# Altium PCB UF_Servo.PcbDoc (part 10 of 12)
Units mm, origin at the board's own origin, x right, y up, seen from the top; angles counter-clockwise.
Board outline 222.63 x 100.1 mm, 6 copper layers (L1, L2, L3, L4, L5, L6), stack 1.609 mm thick; 1138 components, 775 nets, 3720 pads, 1641 vias.
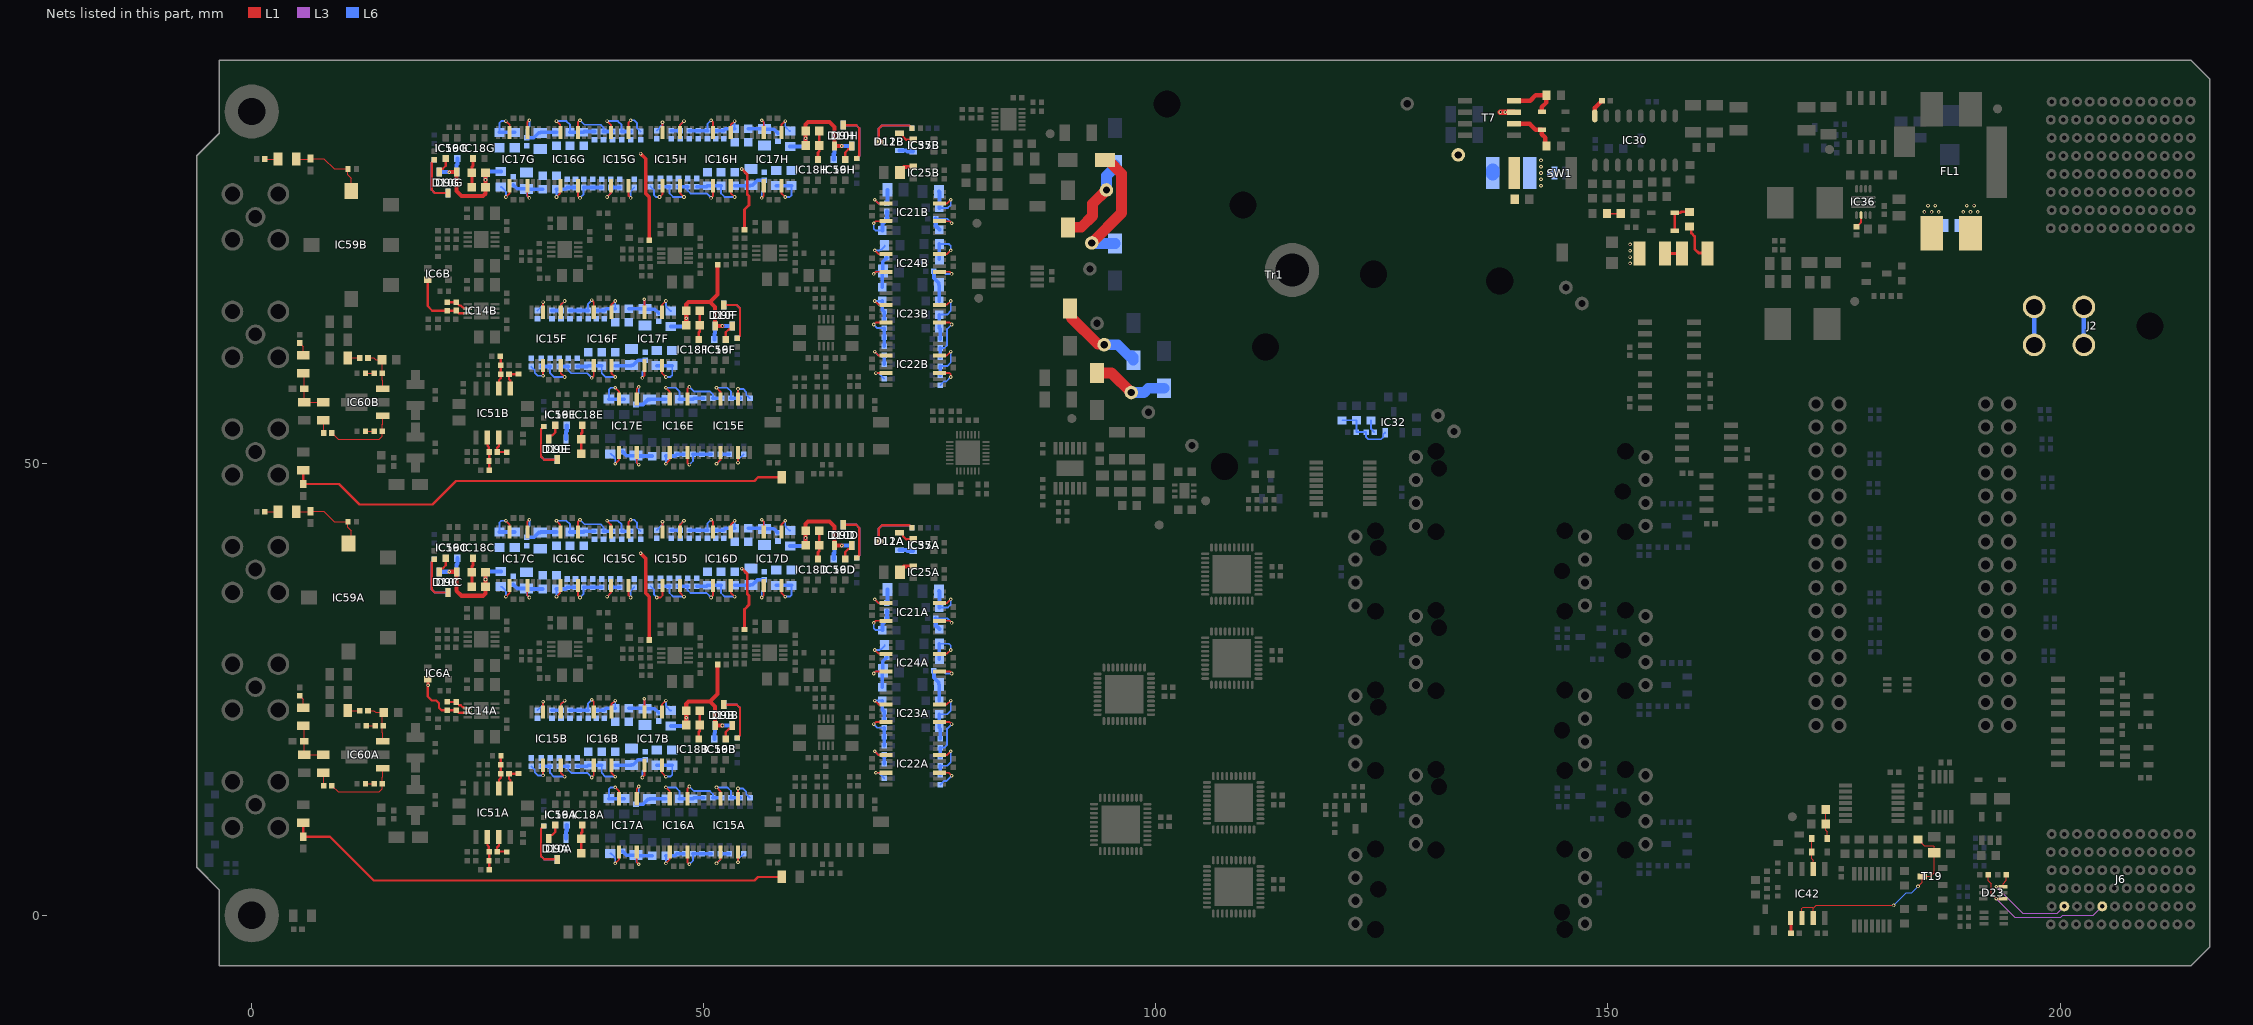
[diagram p11: the nets of this part, all layers, seen from the top]

## Via types
v1: diameter 0.4, hole 0.2, L1 to L6, tented both sides, 1545 vias
v2: diameter 0.4, hole 0.2, L1 to L6, 84 vias
v3: diameter 0.5, hole 0.25, L1 to L6, tented both sides, 12 vias

## Nets (pads, with @x,y where several pads share a name; then routed paths per layer and width w, separated by ;. In a path a pad name is that pad's centre, name@x,y a point inside that pad or via, vN(x,y) a via of type N, cw(c..) or ccw(c..) an arc to the next point about the centre after c; other vN are vias at no path point) (continued)
NetC23A_1: C23A.1 IC6A.4 IC14A.3 R53A.1 | length 8
  L1 w0.25: IC6A.4@19.45,26.165 19.45,24.25 19.9,23.8 20.4,23.8 20.7,23.5 20.7,23 20.97,22.73 R53A.1@21.6,22.73 22.58,22.73 C23A.1@22.6,22.75 22.9,22.45 IC14A.3@23.9,22.45
  L1 w0.3: v1(19.5,25.5) IC6A.4@19.5,26.03
NetC23A_2: C23A.2 IC14A.2 R53A.2 | length 2.6
  L1 w0.25: R53A.2@21.6,23.67 21.62,23.65 C23A.2@22.6,23.65 22.95,23.3 23.104,23.3 23.331,23.073 23.452,23.073 23.575,22.95 IC14A.2@23.9,22.95
NetC23B_1: C23B.1 IC6B.4 IC14B.3 R53B.1 | length 7.7
  L1 w0.25: IC6B.4@19.45,70.365 19.45,67.45 19.97,66.93 R53B.1@21.6,66.93 22.58,66.93 C23B.1@22.6,66.95 22.9,66.65 IC14B.3@23.9,66.65
NetC23B_2: C23B.2 IC14B.2 R53B.2 | length 2.6
  L1 w0.25: R53B.2@21.6,67.87 21.62,67.85 C23B.2@22.6,67.85 22.95,67.5 23.104,67.5 23.331,67.273 23.452,67.273 23.575,67.15 IC14B.2@23.9,67.15
NetC39A_1: C39A.1 IC15A.3 | length 3
  L1 w0.2: IC15A.3@53.775,12.95 v1(53.775,14.075)
  L6 w0.2: v1(53.775,14.075) 54.35,14.075 54.7,13.725 54.7,13.45 C39A.1@55.1,13.05
NetC39B_1: C39B.1 IC15B.3 | length 3
  L1 w0.2: v1(32.225,15.525) IC15B.3@32.225,16.65
  L6 w0.2: C39B.1@30.9,16.55 31.3,16.15 31.3,15.875 31.65,15.525 v1(32.225,15.525)
NetC39B_2: C39B.2 C40B.1 C41B.1 C42B.1 C43B.1 C44B.2 C47B.1 C48B.2 C49B.1 C50B.1 C51B.1 C52B.1 C53B.1 C54B.2 C55B.1 C61B.1 C64B.2 C65B.1 C66B.1 C67B.2 C68B.1 C69B.1 C70B.1 C71B.1 C72B.1 C75B.1 C78B.1 C79B.1 D9B.1 D10B.1 R45A.1 | length 16.7
  L1 w0.45: C79B.1@48.05,21.1 v1(48.05,21.9) C78B.1@48.05,22.7 48.05,23.436 48.314,23.7 50.7,23.7 ; R45A.1@51.53,27.8 51.53,24.53 50.7,23.7 ; v1(52.05,21.05) D9B.1@51.25,21.05 51.25,23.15 50.7,23.7
  L6 w0.45: C71B.1@46.35,21 47.7,21 48.05,21.35 v1(48.05,21.9) ; v1(52.05,21.05) D10B.1@53.15,21.05
NetC39C_1: C39C.1 IC15C.3 | length 3.4
  L1 w0.2: IC15C.3@41.675,42.45 41.675,43.575 v1(41.9,43.8)
  L6 w0.2: v1(41.9,43.8) 42.3,43.8 42.6,43.5 42.6,42.95 C39C.1@43,42.55
NetC39C_2: C39C.2 C40C.1 C41C.1 C42C.1 C43C.1 C44C.2 C47C.1 C48C.2 C49C.1 C50C.1 C51C.1 C52C.1 C53C.1 C54C.2 C55C.1 C61C.1 C64C.2 C65C.1 C66C.1 C67C.2 C68C.1 C69C.1 C70C.1 C71C.1 C72C.1 C75C.1 C78C.1 C79C.1 D9C.1 D10C.1 R4A.2 | length 22.3
  L1 w0.4: v1(43,40.1) 43.575,39.525 43.575,35.69 43.765,35.5 43.97,35.295 R4A.2@43.97,30.5
  L1 w0.45: v1(21.85,38.05) D9C.1@22.65,38.05 22.65,35.95 23.2,35.4 25.586,35.4 25.85,35.664 C78C.1@25.85,36.4 v1(25.85,37.2) C79C.1@25.85,38
  L6 w0.45: D10C.1@20.75,38.05 v1(21.85,38.05) ; v1(25.85,37.2) 25.85,37.75 26.2,38.1 C71C.1@27.55,38.1
NetC39D_1: C39D.1 IC15D.3 | length 3.4
  L1 w0.2: v1(44.8,35.2) 45.2,35.2 45.425,35.425 IC15D.3@45.425,36.55
  L6 w0.2: C39D.1@44.1,36.45 44.5,36.05 44.5,35.5 v1(44.8,35.2)
NetC39D_2: C39D.2 C40D.1 C41D.1 C42D.1 C43D.1 C44D.2 C47D.1 C48D.2 C49D.1 C50D.1 C51D.1 C52D.1 C53D.1 C54D.2 C55D.1 C61D.1 C64D.2 C65D.1 C66D.1 C67D.2 C68D.1 C69D.1 C70D.1 C71D.1 C72D.1 C75D.1 C78D.1 C79D.1 D9D.1 D10D.1 R9A.2 | length 19.5
  L1 w0.3: v1(54.2,38.4) 54.8,37.8 54.8,35.6 55,35.4 55,34.4 54.5,33.9 R9A.2@54.5,31.67
  L1 w0.45: C79D.1@61.25,41 v1(61.25,41.8) C78D.1@61.25,42.6 61.25,43.336 61.514,43.6 63.9,43.6 64.45,43.05 D9D.1@64.45,40.95 v1(65.25,40.95)
  L6 w0.45: C71D.1@59.55,40.9 60.9,40.9 61.25,41.25 v1(61.25,41.8) ; v1(65.25,40.95) D10D.1@66.35,40.95
NetC39E_1: C39E.1 IC15E.3 | length 3
  L1 w0.2: IC15E.3@53.775,57.15 v1(53.775,58.275)
  L6 w0.2: v1(53.775,58.275) 54.35,58.275 54.7,57.925 54.7,57.65 C39E.1@55.1,57.25
NetC39F_1: C39F.1 IC15F.3 | length 3
  L1 w0.2: v1(32.225,59.725) IC15F.3@32.225,60.85
  L6 w0.2: C39F.1@30.9,60.75 31.3,60.35 31.3,60.075 31.65,59.725 v1(32.225,59.725)
NetC39F_2: C39F.2 C40F.1 C41F.1 C42F.1 C43F.1 C44F.2 C47F.1 C48F.2 C49F.1 C50F.1 C51F.1 C52F.1 C53F.1 C54F.2 C55F.1 C61F.1 C64F.2 C65F.1 C66F.1 C67F.2 C68F.1 C69F.1 C70F.1 C71F.1 C72F.1 C75F.1 C78F.1 C79F.1 D9F.1 D10F.1 R45B.1 | length 16.7
  L1 w0.45: C79F.1@48.05,65.3 v1(48.05,66.1) C78F.1@48.05,66.9 48.05,67.636 48.314,67.9 50.7,67.9 ; R45B.1@51.53,72 51.53,68.73 50.7,67.9 ; v1(52.05,65.25) D9F.1@51.25,65.25 51.25,67.35 50.7,67.9
  L6 w0.45: C71F.1@46.35,65.2 47.7,65.2 48.05,65.55 v1(48.05,66.1) ; v1(52.05,65.25) D10F.1@53.15,65.25
NetC39G_1: C39G.1 IC15G.3 | length 3.4
  L1 w0.2: IC15G.3@41.675,86.65 41.675,87.775 v1(41.9,88)
  L6 w0.2: v1(41.9,88) 42.3,88 42.6,87.7 42.6,87.15 C39G.1@43,86.75
NetC39G_2: C39G.2 C40G.1 C41G.1 C42G.1 C43G.1 C44G.2 C47G.1 C48G.2 C49G.1 C50G.1 C51G.1 C52G.1 C53G.1 C54G.2 C55G.1 C61G.1 C64G.2 C65G.1 C66G.1 C67G.2 C68G.1 C69G.1 C70G.1 C71G.1 C72G.1 C75G.1 C78G.1 C79G.1 D9G.1 D10G.1 R4B.2 | length 22.3
  L1 w0.4: v1(43,84.3) 43.575,83.725 43.575,79.89 43.765,79.7 43.97,79.495 R4B.2@43.97,74.7
  L1 w0.45: v1(21.85,82.25) D9G.1@22.65,82.25 22.65,80.15 23.2,79.6 25.586,79.6 25.85,79.864 C78G.1@25.85,80.6 v1(25.85,81.4) C79G.1@25.85,82.2
  L6 w0.45: D10G.1@20.75,82.25 v1(21.85,82.25) ; v1(25.85,81.4) 25.85,81.95 26.2,82.3 C71G.1@27.55,82.3
NetC39H_1: C39H.1 IC15H.3 | length 3.2
  L1 w0.2: v1(45.1,79.5) 45.425,79.825 IC15H.3@45.425,80.75
  L6 w0.2: C39H.1@44.1,80.65 44.5,80.25 44.5,79.7 44.7,79.5 v1(45.1,79.5)
NetC39H_2: C39H.2 C40H.1 C41H.1 C42H.1 C43H.1 C44H.2 C47H.1 C48H.2 C49H.1 C50H.1 C51H.1 C52H.1 C53H.1 C54H.2 C55H.1 C61H.1 C64H.2 C65H.1 C66H.1 C67H.2 C68H.1 C69H.1 C70H.1 C71H.1 C72H.1 C75H.1 C78H.1 C79H.1 D9H.1 D10H.1 R9B.2 | length 19.5
  L1 w0.3: v1(54.2,82.6) 54.8,82 54.8,79.8 55,79.6 55,78.6 54.5,78.1 R9B.2@54.5,75.87
  L1 w0.45: C79H.1@61.25,85.2 v1(61.25,86) C78H.1@61.25,86.8 61.25,87.536 61.514,87.8 63.9,87.8 64.45,87.25 D9H.1@64.45,85.15 v1(65.25,85.15)
  L6 w0.45: C71H.1@59.55,85.1 60.9,85.1 61.25,85.45 v1(61.25,86) ; v1(65.25,85.15) D10H.1@66.35,85.15
NetC40A_2: C40A.2 IC15A.14 | length 2.3
  L1 w0.2: v1(53.775,5.925) IC15A.14@53.775,7.05
  L6 w0.2: v1(53.775,5.925) 53.779,5.929 53.779,6.229 C40A.2@54.4,6.85
NetC40B_2: C40B.2 IC15B.14 | length 2.3
  L1 w0.2: IC15B.14@32.225,22.55 v1(32.225,23.675)
  L6 w0.2: C40B.2@31.6,22.75 32.221,23.371 32.221,23.671 v1(32.225,23.675)
NetC40C_2: C40C.2 IC15C.14 | length 2.8
  L1 w0.2: IC15C.14@41.675,36.55 41.675,35.425 v1(41.9,35.2)
  L6 w0.2: v1(41.9,35.2) 41.9,35.95 C40C.2@42.3,36.35
NetC40D_2: C40D.2 IC15D.14 | length 2.3
  L1 w0.2: IC15D.14@45.425,42.45 v1(45.425,43.575)
  L6 w0.2: C40D.2@44.8,42.65 45.421,43.271 45.421,43.571 v1(45.425,43.575)
NetC40E_2: C40E.2 IC15E.14 | length 2.3
  L1 w0.2: v1(53.775,50.125) IC15E.14@53.775,51.25
  L6 w0.2: v1(53.775,50.125) 53.779,50.129 53.779,50.429 C40E.2@54.4,51.05
NetC40F_2: C40F.2 IC15F.14 | length 2.3
  L1 w0.2: IC15F.14@32.225,66.75 v1(32.225,67.875)
  L6 w0.2: C40F.2@31.6,66.95 32.221,67.571 32.221,67.871 v1(32.225,67.875)
NetC40G_2: C40G.2 IC15G.14 | length 2.8
  L1 w0.2: IC15G.14@41.675,80.75 41.675,79.625 v1(41.9,79.4)
  L6 w0.2: v1(41.9,79.4) 41.9,80.15 C40G.2@42.3,80.55
NetC40H_2: C40H.2 IC15H.14 | length 2.3
  L1 w0.2: IC15H.14@45.425,86.65 v1(45.425,87.775)
  L6 w0.2: C40H.2@44.8,86.85 45.421,87.471 45.421,87.771 v1(45.425,87.775)
NetC41A_2: C41A.2 C42A.2 IC15A.11 | length 3.6
  L1 w0.2: v1(51.4,5.8) 51.825,6.225 IC15A.11@51.825,7.05
  L6 w0.2: v1(51.4,5.8) 51.8,6.2 C41A.2@51.8,6.85
  L6 w0.4: C41A.2@51.8,6.85 C42A.2@52.8,6.85
NetC41B_2: C41B.2 C42B.2 IC15B.11 | length 3.6
  L1 w0.2: IC15B.11@34.175,22.55 34.175,23.375 v1(34.6,23.8)
  L6 w0.2: C41B.2@34.2,22.75 34.2,23.4 v1(34.6,23.8)
  L6 w0.4: C42B.2@33.2,22.75 C41B.2@34.2,22.75
NetC41C_2: C41C.2 C42C.2 IC15C.11 | length 3.6
  L1 w0.2: v1(39.3,35.3) 39.725,35.725 IC15C.11@39.725,36.55
  L6 w0.2: v1(39.3,35.3) 39.7,35.7 C41C.2@39.7,36.35
  L6 w0.4: C41C.2@39.7,36.35 C42C.2@40.7,36.35
NetC41D_2: C41D.2 C42D.2 IC15D.11 | length 3.6
  L1 w0.2: IC15D.11@47.375,42.45 47.375,43.275 v1(47.8,43.7)
  L6 w0.2: C41D.2@47.4,42.65 47.4,43.3 v1(47.8,43.7)
  L6 w0.4: C42D.2@46.4,42.65 C41D.2@47.4,42.65
NetC41E_2: C41E.2 C42E.2 IC15E.11 | length 3.6
  L1 w0.2: v1(51.4,50) 51.825,50.425 IC15E.11@51.825,51.25
  L6 w0.2: v1(51.4,50) 51.8,50.4 C41E.2@51.8,51.05
  L6 w0.4: C41E.2@51.8,51.05 C42E.2@52.8,51.05
NetC41F_2: C41F.2 C42F.2 IC15F.11 | length 3.6
  L1 w0.2: IC15F.11@34.175,66.75 34.175,67.575 v1(34.6,68)
  L6 w0.2: C41F.2@34.2,66.95 34.2,67.6 v1(34.6,68)
  L6 w0.4: C42F.2@33.2,66.95 C41F.2@34.2,66.95
NetC41G_2: C41G.2 C42G.2 IC15G.11 | length 3.6
  L1 w0.2: v1(39.3,79.5) 39.725,79.925 IC15G.11@39.725,80.75
  L6 w0.2: v1(39.3,79.5) 39.7,79.9 C41G.2@39.7,80.55
  L6 w0.4: C41G.2@39.7,80.55 C42G.2@40.7,80.55
NetC41H_2: C41H.2 C42H.2 IC15H.11 | length 3.6
  L1 w0.2: IC15H.11@47.375,86.65 47.375,87.475 v1(47.8,87.9)
  L6 w0.2: C41H.2@47.4,86.85 47.4,87.5 v1(47.8,87.9)
  L6 w0.4: C42H.2@46.4,86.85 C41H.2@47.4,86.85
NetC43A_2: C43A.2 C44A.1 IC15A.6 | length 4.9
  L1 w0.2: v1(51.4,14.2) 51.825,13.775 IC15A.6@51.825,12.95
  L6 w0.2: v1(51.4,14.2) 52.6,14.2 53,13.8 C43A.2@53,13.05
  L6 w0.4: C43A.2@53,13.05 C44A.1@54,13.05
NetC43B_2: C43B.2 C44B.1 IC15B.6 | length 4.9
  L1 w0.2: IC15B.6@34.175,16.65 34.175,15.825 v1(34.6,15.4)
  L6 w0.2: C43B.2@33,16.55 33,15.8 33.4,15.4 v1(34.6,15.4)
  L6 w0.4: C44B.1@32,16.55 C43B.2@33,16.55
NetC43C_2: C43C.2 C44C.1 IC15C.6 | length 4.9
  L1 w0.2: v1(39.3,43.7) 39.725,43.275 IC15C.6@39.725,42.45
  L6 w0.2: v1(39.3,43.7) 40.5,43.7 40.9,43.3 C43C.2@40.9,42.55
  L6 w0.4: C43C.2@40.9,42.55 C44C.1@41.9,42.55
NetC43D_2: C43D.2 C44D.1 IC15D.6 | length 4.9
  L1 w0.2: IC15D.6@47.375,36.55 47.375,35.725 v1(47.8,35.3)
  L6 w0.2: C43D.2@46.2,36.45 46.2,35.7 46.6,35.3 v1(47.8,35.3)
  L6 w0.4: C44D.1@45.2,36.45 C43D.2@46.2,36.45
NetC43E_2: C43E.2 C44E.1 IC15E.6 | length 4.9
  L1 w0.2: v1(51.4,58.4) 51.825,57.975 IC15E.6@51.825,57.15
  L6 w0.2: v1(51.4,58.4) 52.6,58.4 53,58 C43E.2@53,57.25
  L6 w0.4: C43E.2@53,57.25 C44E.1@54,57.25
NetC43F_2: C43F.2 C44F.1 IC15F.6 | length 4.9
  L1 w0.2: IC15F.6@34.175,60.85 34.175,60.025 v1(34.6,59.6)
  L6 w0.2: C43F.2@33,60.75 33,60 33.4,59.6 v1(34.6,59.6)
  L6 w0.4: C44F.1@32,60.75 C43F.2@33,60.75
NetC43G_2: C43G.2 C44G.1 IC15G.6 | length 4.9
  L1 w0.2: v1(39.3,87.9) 39.725,87.475 IC15G.6@39.725,86.65
  L6 w0.2: v1(39.3,87.9) 40.5,87.9 40.9,87.5 C43G.2@40.9,86.75
  L6 w0.4: C43G.2@40.9,86.75 C44G.1@41.9,86.75
NetC43H_2: C43H.2 C44H.1 IC15H.6 | length 4.9
  L1 w0.2: IC15H.6@47.375,80.75 47.375,79.925 v1(47.8,79.5)
  L6 w0.2: C43H.2@46.2,80.65 46.2,79.9 46.6,79.5 v1(47.8,79.5)
  L6 w0.4: C44H.1@45.2,80.65 C43H.2@46.2,80.65
NetC47A_2: C47A.2 C48A.1 IC16A.3 | length 5.8
  L1 w0.2: IC16A.3@48.175,12.95 48.175,14.075 v1(48.4,14.3)
  L6 w0.2: v1(48.4,14.3) 48.9,13.8 50.675,13.8 51,13.475 C48A.1@51,13.05
  L6 w0.4: C48A.1@51,13.05 C47A.2@52,13.05
NetC47B_2: C47B.2 C48B.1 IC16B.3 | length 5.8
  L1 w0.2: v1(37.6,15.3) 37.825,15.525 IC16B.3@37.825,16.65
  L6 w0.2: C48B.1@35,16.55 35,16.125 35.325,15.8 37.1,15.8 v1(37.6,15.3)
  L6 w0.4: C47B.2@34,16.55 C48B.1@35,16.55
NetC47C_2: C47C.2 C48C.1 IC16C.3 | length 5.8
  L1 w0.2: IC16C.3@36.075,42.45 36.075,43.575 v1(36.3,43.8)
  L6 w0.2: v1(36.3,43.8) 36.8,43.3 38.575,43.3 38.9,42.975 C48C.1@38.9,42.55
  L6 w0.4: C48C.1@38.9,42.55 C47C.2@39.9,42.55
NetC47D_2: C47D.2 C48D.1 IC16D.3 | length 5.8
  L1 w0.2: v1(50.8,35.2) 51.025,35.425 IC16D.3@51.025,36.55
  L6 w0.2: C48D.1@48.2,36.45 48.2,36.025 48.525,35.7 50.3,35.7 v1(50.8,35.2)
  L6 w0.4: C47D.2@47.2,36.45 C48D.1@48.2,36.45
NetC47E_2: C47E.2 C48E.1 IC16E.3 | length 5.8
  L1 w0.2: IC16E.3@48.175,57.15 48.175,58.275 v1(48.4,58.5)
  L6 w0.2: v1(48.4,58.5) 48.9,58 50.675,58 51,57.675 C48E.1@51,57.25
  L6 w0.4: C48E.1@51,57.25 C47E.2@52,57.25
NetC47F_2: C47F.2 C48F.1 IC16F.3 | length 5.8
  L1 w0.2: v1(37.6,59.5) 37.825,59.725 IC16F.3@37.825,60.85
  L6 w0.2: C48F.1@35,60.75 35,60.325 35.325,60 37.1,60 v1(37.6,59.5)
  L6 w0.4: C47F.2@34,60.75 C48F.1@35,60.75
NetC47G_2: C47G.2 C48G.1 IC16G.3 | length 5.8
  L1 w0.2: IC16G.3@36.075,86.65 36.075,87.775 v1(36.3,88)
  L6 w0.2: v1(36.3,88) 36.8,87.5 38.575,87.5 38.9,87.175 C48G.1@38.9,86.75
  L6 w0.4: C48G.1@38.9,86.75 C47G.2@39.9,86.75
NetC47H_2: C47H.2 C48H.1 IC16H.3 | length 5.8
  L1 w0.2: v1(50.8,79.4) 51.025,79.625 IC16H.3@51.025,80.75
  L6 w0.2: C48H.1@48.2,80.65 48.2,80.225 48.525,79.9 50.3,79.9 v1(50.8,79.4)
  L6 w0.4: C47H.2@47.2,80.65 C48H.1@48.2,80.65
NetC49A_2: C49A.2 C50A.2 C51A.2 IC16A.14 | length 4.8
  L1 w0.2: IC16A.14@48.175,7.05 48.175,5.925 v1(48.4,5.7)
  L6 w0.2: v1(48.4,5.7) 48.8,6.1 C49A.2@48.8,6.85
  L6 w0.4: C49A.2@48.8,6.85 C50A.2@49.8,6.85 C51A.2@50.8,6.85
NetC49B_2: C49B.2 C50B.2 C51B.2 IC16B.14 | length 4.8
  L1 w0.2: v1(37.6,23.9) 37.825,23.675 IC16B.14@37.825,22.55
  L6 w0.2: C49B.2@37.2,22.75 37.2,23.5 v1(37.6,23.9)
  L6 w0.4: C51B.2@35.2,22.75 C50B.2@36.2,22.75 C49B.2@37.2,22.75
NetC49C_2: C49C.2 C50C.2 C51C.2 IC16C.14 | length 4.8
  L1 w0.2: IC16C.14@36.075,36.55 36.075,35.425 v1(36.3,35.2)
  L6 w0.2: v1(36.3,35.2) 36.7,35.6 C49C.2@36.7,36.35
  L6 w0.4: C49C.2@36.7,36.35 C50C.2@37.7,36.35 C51C.2@38.7,36.35
NetC49D_2: C49D.2 C50D.2 C51D.2 IC16D.14 | length 4.8
  L1 w0.2: v1(50.8,43.8) 51.025,43.575 IC16D.14@51.025,42.45
  L6 w0.2: C49D.2@50.4,42.65 50.4,43.4 v1(50.8,43.8)
  L6 w0.4: C51D.2@48.4,42.65 C50D.2@49.4,42.65 C49D.2@50.4,42.65
NetC49E_2: C49E.2 C50E.2 C51E.2 IC16E.14 | length 4.8
  L1 w0.2: IC16E.14@48.175,51.25 48.175,50.125 v1(48.4,49.9)
  L6 w0.2: v1(48.4,49.9) 48.8,50.3 C49E.2@48.8,51.05
  L6 w0.4: C49E.2@48.8,51.05 C50E.2@49.8,51.05 C51E.2@50.8,51.05
NetC49F_2: C49F.2 C50F.2 C51F.2 IC16F.14 | length 4.8
  L1 w0.2: v1(37.6,68.1) 37.825,67.875 IC16F.14@37.825,66.75
  L6 w0.2: C49F.2@37.2,66.95 37.2,67.7 v1(37.6,68.1)
  L6 w0.4: C51F.2@35.2,66.95 C50F.2@36.2,66.95 C49F.2@37.2,66.95
NetC49G_2: C49G.2 C50G.2 C51G.2 IC16G.14 | length 4.8
  L1 w0.2: IC16G.14@36.075,80.75 36.075,79.625 v1(36.3,79.4)
  L6 w0.2: v1(36.3,79.4) 36.7,79.8 C49G.2@36.7,80.55
  L6 w0.4: C49G.2@36.7,80.55 C50G.2@37.7,80.55 C51G.2@38.7,80.55
NetC49H_2: C49H.2 C50H.2 C51H.2 IC16H.14 | length 4.8
  L1 w0.2: v1(50.8,88) 51.025,87.775 IC16H.14@51.025,86.65
  L6 w0.2: C49H.2@50.4,86.85 50.4,87.6 v1(50.8,88)
  L6 w0.4: C51H.2@48.4,86.85 C50H.2@49.4,86.85 C49H.2@50.4,86.85
NetC52A_2: C52A.2 C53A.2 C54A.1 IC16A.11 | length 4.5
  L1 w0.2: v1(45.8,5.8) 46.225,6.225 IC16A.11@46.225,7.05
  L6 w0.2: v1(45.8,5.8) C52A.2@45.8,6.65
  L6 w0.4: C52A.2@45.8,6.65 46.8,6.65 C54A.1@47,6.85 C53A.2@47.9,6.85
NetC52B_2: C52B.2 C53B.2 C54B.1 IC16B.11 | length 4.5
  L1 w0.2: IC16B.11@39.775,22.55 39.775,23.375 v1(40.2,23.8)
  L6 w0.2: C52B.2@40.2,22.95 v1(40.2,23.8)
  L6 w0.4: C53B.2@38.1,22.75 C54B.1@39,22.75 39.2,22.95 C52B.2@40.2,22.95
NetC52C_2: C52C.2 C53C.2 C54C.1 IC16C.11 | length 4.5
  L1 w0.2: v1(33.7,35.3) 34.125,35.725 IC16C.11@34.125,36.55
  L6 w0.2: v1(33.7,35.3) C52C.2@33.7,36.15
  L6 w0.4: C52C.2@33.7,36.15 34.7,36.15 C54C.1@34.9,36.35 C53C.2@35.8,36.35
NetC52D_2: C52D.2 C53D.2 C54D.1 IC16D.11 | length 4.5
  L1 w0.2: IC16D.11@52.975,42.45 52.975,43.275 v1(53.4,43.7)
  L6 w0.2: C52D.2@53.4,42.85 v1(53.4,43.7)
  L6 w0.4: C53D.2@51.3,42.65 C54D.1@52.2,42.65 52.4,42.85 C52D.2@53.4,42.85
NetC52E_2: C52E.2 C53E.2 C54E.1 IC16E.11 | length 4.5
  L1 w0.2: v1(45.8,50) 46.225,50.425 IC16E.11@46.225,51.25
  L6 w0.2: v1(45.8,50) C52E.2@45.8,50.85
  L6 w0.4: C52E.2@45.8,50.85 46.8,50.85 C54E.1@47,51.05 C53E.2@47.9,51.05
NetC52F_2: C52F.2 C53F.2 C54F.1 IC16F.11 | length 4.5
  L1 w0.2: IC16F.11@39.775,66.75 39.775,67.575 v1(40.2,68)
  L6 w0.2: C52F.2@40.2,67.15 v1(40.2,68)
  L6 w0.4: C53F.2@38.1,66.95 C54F.1@39,66.95 39.2,67.15 C52F.2@40.2,67.15
NetC52G_2: C52G.2 C53G.2 C54G.1 IC16G.11 | length 4.5
  L1 w0.2: v1(33.7,79.5) 34.125,79.925 IC16G.11@34.125,80.75
  L6 w0.2: v1(33.7,79.5) C52G.2@33.7,80.35
  L6 w0.4: C52G.2@33.7,80.35 34.7,80.35 C54G.1@34.9,80.55 C53G.2@35.8,80.55
NetC52H_2: C52H.2 C53H.2 C54H.1 IC16H.11 | length 4.5
  L1 w0.2: IC16H.11@52.975,86.65 52.975,87.475 v1(53.4,87.9)
  L6 w0.2: C52H.2@53.4,87.05 v1(53.4,87.9)
  L6 w0.4: C53H.2@51.3,86.85 C54H.1@52.2,86.85 52.4,87.05 C52H.2@53.4,87.05
NetC55A_2: C55A.2 C61A.2 C64A.1 IC16A.6 | length 6.7
  L1 w0.2: v1(45.8,14.2) 46.225,13.775 IC16A.6@46.225,12.95
  L6 w0.2: v1(45.8,14.2) 46.9,14.2 47.3,13.8 C55A.2@47.3,12.95
  L6 w0.4: C55A.2@47.3,12.95 C61A.2@48.8,12.95 48.9,13.05 C64A.1@50,13.05
NetC55B_2: C55B.2 C61B.2 C64B.1 IC16B.6 | length 6.7
  L1 w0.2: IC16B.6@39.775,16.65 39.775,15.825 v1(40.2,15.4)
  L6 w0.2: C55B.2@38.7,16.65 38.7,15.8 39.1,15.4 v1(40.2,15.4)
  L6 w0.4: C64B.1@36,16.55 37.1,16.55 C61B.2@37.2,16.65 C55B.2@38.7,16.65
NetC55C_2: C55C.2 C61C.2 C64C.1 IC16C.6 | length 6.7
  L1 w0.2: v1(33.7,43.7) 34.125,43.275 IC16C.6@34.125,42.45
  L6 w0.2: v1(33.7,43.7) 34.8,43.7 35.2,43.3 C55C.2@35.2,42.45
  L6 w0.4: C55C.2@35.2,42.45 C61C.2@36.7,42.45 36.8,42.55 C64C.1@37.9,42.55
NetC55D_2: C55D.2 C61D.2 C64D.1 IC16D.6 | length 6.7
  L1 w0.2: IC16D.6@52.975,36.55 52.975,35.725 v1(53.4,35.3)
  L6 w0.2: C55D.2@51.9,36.55 51.9,35.7 52.3,35.3 v1(53.4,35.3)
  L6 w0.4: C64D.1@49.2,36.45 50.3,36.45 C61D.2@50.4,36.55 C55D.2@51.9,36.55
NetC55E_2: C55E.2 C61E.2 C64E.1 IC16E.6 | length 6.7
  L1 w0.2: v1(45.8,58.4) 46.225,57.975 IC16E.6@46.225,57.15
  L6 w0.2: v1(45.8,58.4) 46.9,58.4 47.3,58 C55E.2@47.3,57.15
  L6 w0.4: C55E.2@47.3,57.15 C61E.2@48.8,57.15 48.9,57.25 C64E.1@50,57.25
NetC55F_2: C55F.2 C61F.2 C64F.1 IC16F.6 | length 6.7
  L1 w0.2: IC16F.6@39.775,60.85 39.775,60.025 v1(40.2,59.6)
  L6 w0.2: C55F.2@38.7,60.85 38.7,60 39.1,59.6 v1(40.2,59.6)
  L6 w0.4: C64F.1@36,60.75 37.1,60.75 C61F.2@37.2,60.85 C55F.2@38.7,60.85
NetC55G_2: C55G.2 C61G.2 C64G.1 IC16G.6 | length 6.7
  L1 w0.2: v1(33.7,87.9) 34.125,87.475 IC16G.6@34.125,86.65
  L6 w0.2: v1(33.7,87.9) 34.8,87.9 35.2,87.5 C55G.2@35.2,86.65
  L6 w0.4: C55G.2@35.2,86.65 C61G.2@36.7,86.65 36.8,86.75 C64G.1@37.9,86.75
NetC55H_2: C55H.2 C61H.2 C64H.1 IC16H.6 | length 6.7
  L1 w0.2: IC16H.6@52.975,80.75 52.975,79.925 v1(53.4,79.5)
  L6 w0.2: C55H.2@51.9,80.75 51.9,79.9 52.3,79.5 v1(53.4,79.5)
  L6 w0.4: C64H.1@49.2,80.65 50.3,80.65 C61H.2@50.4,80.75 C55H.2@51.9,80.75
NetC65A_2: C65A.2 C66A.2 C67A.1 IC17A.3 | length 7.1
  L1 w0.2: IC17A.3@42.575,12.95 42.575,14.075 v1(42.8,14.3)
  L6 w0.2: C67A.1@42.5,12.35 42.5,13.3 42.8,13.6 v1(42.8,14.3)
  L6 w0.4: C67A.1@42.5,12.35 43.275,12.35 43.825,12.9 C65A.2@44,12.9 44.05,12.95 C66A.2@45.8,12.95
NetC65B_2: C65B.2 C66B.2 C67B.1 IC17B.3 | length 7.1
  L1 w0.2: v1(43.2,15.3) 43.425,15.525 IC17B.3@43.425,16.65
  L6 w0.2: v1(43.2,15.3) 43.2,16 43.5,16.3 C67B.1@43.5,17.25
  L6 w0.4: C66B.2@40.2,16.65 41.95,16.65 C65B.2@42,16.7 42.175,16.7 42.725,17.25 C67B.1@43.5,17.25
NetC65C_2: C65C.2 C66C.2 C67C.1 IC17C.3 | length 7.1
  L1 w0.2: IC17C.3@30.475,42.45 30.475,43.575 v1(30.7,43.8)
  L6 w0.2: C67C.1@30.4,41.85 30.4,42.8 30.7,43.1 v1(30.7,43.8)
  L6 w0.4: C67C.1@30.4,41.85 31.175,41.85 31.725,42.4 C65C.2@31.9,42.4 31.95,42.45 C66C.2@33.7,42.45
NetC65D_2: C65D.2 C66D.2 C67D.1 IC17D.3 | length 7.1
  L1 w0.2: v1(56.4,35.2) 56.625,35.425 IC17D.3@56.625,36.55
  L6 w0.2: v1(56.4,35.2) 56.4,35.9 56.7,36.2 C67D.1@56.7,37.15
  L6 w0.4: C66D.2@53.4,36.55 55.15,36.55 C65D.2@55.2,36.6 55.375,36.6 55.925,37.15 C67D.1@56.7,37.15
NetC65E_2: C65E.2 C66E.2 C67E.1 IC17E.3 | length 7.1
  L1 w0.2: IC17E.3@42.575,57.15 42.575,58.275 v1(42.8,58.5)
  L6 w0.2: C67E.1@42.5,56.55 42.5,57.5 42.8,57.8 v1(42.8,58.5)
  L6 w0.4: C67E.1@42.5,56.55 43.275,56.55 43.825,57.1 C65E.2@44,57.1 44.05,57.15 C66E.2@45.8,57.15
NetC65F_2: C65F.2 C66F.2 C67F.1 IC17F.3 | length 7.1
  L1 w0.2: v1(43.2,59.5) 43.425,59.725 IC17F.3@43.425,60.85
  L6 w0.2: v1(43.2,59.5) 43.2,60.2 43.5,60.5 C67F.1@43.5,61.45
  L6 w0.4: C66F.2@40.2,60.85 41.95,60.85 C65F.2@42,60.9 42.175,60.9 42.725,61.45 C67F.1@43.5,61.45
NetC65G_2: C65G.2 C66G.2 C67G.1 IC17G.3 | length 7.1
  L1 w0.2: IC17G.3@30.475,86.65 30.475,87.775 v1(30.7,88)
  L6 w0.2: C67G.1@30.4,86.05 30.4,87 30.7,87.3 v1(30.7,88)
  L6 w0.4: C67G.1@30.4,86.05 31.175,86.05 31.725,86.6 C65G.2@31.9,86.6 31.95,86.65 C66G.2@33.7,86.65
NetC65H_2: C65H.2 C66H.2 C67H.1 IC17H.3 | length 7.1
  L1 w0.2: v1(56.4,79.4) 56.625,79.625 IC17H.3@56.625,80.75
  L6 w0.2: v1(56.4,79.4) 56.4,80.1 56.7,80.4 C67H.1@56.7,81.35
  L6 w0.4: C66H.2@53.4,80.75 55.15,80.75 C65H.2@55.2,80.8 55.375,80.8 55.925,81.35 C67H.1@56.7,81.35
NetC68A_2: C68A.2 C69A.2 C70A.2 IC17A.14 | length 5.9
  L1 w0.2: IC17A.14@42.575,7.05 42.575,5.925 v1(42.8,5.7)
  L6 w0.2: C68A.2@42.55,6.65 42.55,5.95 v1(42.8,5.7)
  L6 w0.4: C70A.2@41,7.15 41.45,6.7 C68A.2@42.5,6.7 ; C68A.2@42.55,6.65 C69A.2@44.3,6.65
NetC68B_2: C68B.2 C69B.2 C70B.2 IC17B.14 | length 6
  L1 w0.2: v1(43.4,24) 43.425,23.975 IC17B.14@43.425,22.55
  L6 w0.2: v1(43.4,24) 43.4,23.946 43.45,23.896 C68B.2@43.45,22.95
  L6 w0.4: C69B.2@41.7,22.95 C68B.2@43.45,22.95 ; C68B.2@43.5,22.9 44.55,22.9 C70B.2@45,22.45
NetC68C_2: C68C.2 C69C.2 C70C.2 IC17C.14 | length 5.9
  L1 w0.2: IC17C.14@30.475,36.55 30.475,35.425 v1(30.7,35.2)
  L6 w0.2: C68C.2@30.45,36.15 30.45,35.45 v1(30.7,35.2)
  L6 w0.4: C70C.2@28.9,36.65 29.35,36.2 C68C.2@30.4,36.2 ; C68C.2@30.45,36.15 C69C.2@32.2,36.15
NetC68D_2: C68D.2 C69D.2 C70D.2 IC17D.14 | length 5.9
  L1 w0.2: v1(56.4,43.8) 56.625,43.575 IC17D.14@56.625,42.45
  L6 w0.2: v1(56.4,43.8) 56.65,43.55 C68D.2@56.65,42.85
  L6 w0.4: C69D.2@54.9,42.85 C68D.2@56.65,42.85 ; C68D.2@56.7,42.8 57.75,42.8 C70D.2@58.2,42.35
NetC68E_2: C68E.2 C69E.2 C70E.2 IC17E.14 | length 5.9
  L1 w0.2: IC17E.14@42.575,51.25 42.575,50.125 v1(42.8,49.9)
  L6 w0.2: C68E.2@42.55,50.85 42.55,50.15 v1(42.8,49.9)
  L6 w0.4: C70E.2@41,51.35 41.45,50.9 C68E.2@42.5,50.9 ; C68E.2@42.55,50.85 C69E.2@44.3,50.85
NetC68F_2: C68F.2 C69F.2 C70F.2 IC17F.14 | length 6
  L1 w0.2: v1(43.4,68.2) 43.425,68.175 IC17F.14@43.425,66.75
  L6 w0.2: v1(43.4,68.2) 43.4,68.146 43.45,68.096 C68F.2@43.45,67.15
  L6 w0.4: C69F.2@41.7,67.15 C68F.2@43.45,67.15 ; C68F.2@43.5,67.1 44.55,67.1 C70F.2@45,66.65
NetC68G_2: C68G.2 C69G.2 C70G.2 IC17G.14 | length 5.9
  L1 w0.2: IC17G.14@30.475,80.75 30.475,79.625 v1(30.7,79.4)
  L6 w0.2: C68G.2@30.45,80.35 30.45,79.65 v1(30.7,79.4)
  L6 w0.4: C70G.2@28.9,80.85 29.35,80.4 C68G.2@30.4,80.4 ; C68G.2@30.45,80.35 C69G.2@32.2,80.35
NetC68H_2: C68H.2 C69H.2 C70H.2 IC17H.14 | length 5.9
  L1 w0.2: v1(56.4,88) 56.625,87.775 IC17H.14@56.625,86.65
  L6 w0.2: v1(56.4,88) 56.65,87.75 C68H.2@56.65,87.05
  L6 w0.4: C69H.2@54.9,87.05 C68H.2@56.65,87.05 ; C68H.2@56.7,87 57.75,87 C70H.2@58.2,86.55
NetC71A_2: C71A.2 IC17A.11 | length 2.8
  L1 w0.2: v1(40.2,5.8) 40.625,6.225 IC17A.11@40.625,7.05
  L6 w0.2: C71A.2@39.65,6.9 39.725,6.9 40.125,6.5 40.125,6.425 40.2,6.35 v1(40.2,5.8)
NetC71B_2: C71B.2 IC17B.11 | length 2.8
  L1 w0.2: IC17B.11@45.375,22.55 45.375,23.375 v1(45.8,23.8)
  L6 w0.2: v1(45.8,23.8) 45.8,23.25 45.875,23.175 45.875,23.1 46.275,22.7 C71B.2@46.35,22.7
NetC71C_2: C71C.2 IC17C.11 | length 2.8
  L1 w0.2: v1(28.1,35.3) 28.525,35.725 IC17C.11@28.525,36.55
  L6 w0.2: C71C.2@27.55,36.4 27.625,36.4 28.025,36 28.025,35.925 28.1,35.85 v1(28.1,35.3)
NetC71D_2: C71D.2 IC17D.11 | length 2.8
  L1 w0.2: IC17D.11@58.575,42.45 58.575,43.275 v1(59,43.7)
  L6 w0.2: v1(59,43.7) 59,43.15 59.075,43.075 59.075,43 59.475,42.6 C71D.2@59.55,42.6
NetC71E_2: C71E.2 IC17E.11 | length 2.8
  L1 w0.2: v1(40.2,50) 40.625,50.425 IC17E.11@40.625,51.25
  L6 w0.2: C71E.2@39.65,51.1 39.725,51.1 40.125,50.7 40.125,50.625 40.2,50.55 v1(40.2,50)
NetC71F_2: C71F.2 IC17F.11 | length 2.8
  L1 w0.2: IC17F.11@45.375,66.75 45.375,67.575 v1(45.8,68)
  L6 w0.2: v1(45.8,68) 45.8,67.45 45.875,67.375 45.875,67.3 46.275,66.9 C71F.2@46.35,66.9
NetC71G_2: C71G.2 IC17G.11 | length 2.8
  L1 w0.2: v1(28.1,79.5) 28.525,79.925 IC17G.11@28.525,80.75
  L6 w0.2: C71G.2@27.55,80.6 27.625,80.6 28.025,80.2 28.025,80.125 28.1,80.05 v1(28.1,79.5)
NetC71H_2: C71H.2 IC17H.11 | length 2.8
  L1 w0.2: IC17H.11@58.575,86.65 58.575,87.475 v1(59,87.9)
  L6 w0.2: v1(59,87.9) 59,87.35 59.075,87.275 59.075,87.2 59.475,86.8 C71H.2@59.55,86.8
NetC72A_2: C72A.2 C75A.2 IC17A.6 | length 5
  L1 w0.2: v1(40.2,14.2) 40.625,13.775 IC17A.6@40.625,12.95
  L6 w0.2: C72A.2@39.5,12.95 39.5,14 39.7,14.2 v1(40.2,14.2)
  L6 w0.4: C72A.2@39.5,12.95 C75A.2@41.2,12.95
NetC72B_2: C72B.2 C75B.2 IC17B.6 | length 5
  L1 w0.2: IC17B.6@45.375,16.65 45.375,15.825 v1(45.8,15.4)
  L6 w0.2: v1(45.8,15.4) 46.3,15.4 46.5,15.6 C72B.2@46.5,16.65
  L6 w0.4: C75B.2@44.8,16.65 C72B.2@46.5,16.65
NetC72C_2: C72C.2 C75C.2 IC17C.6 | length 5
  L1 w0.2: v1(28.1,43.7) 28.525,43.275 IC17C.6@28.525,42.45
  L6 w0.2: C72C.2@27.4,42.45 27.4,43.5 27.6,43.7 v1(28.1,43.7)
  L6 w0.4: C72C.2@27.4,42.45 C75C.2@29.1,42.45
NetC72D_2: C72D.2 C75D.2 IC17D.6 | length 5
  L1 w0.2: IC17D.6@58.575,36.55 58.575,35.725 v1(59,35.3)
  L6 w0.2: v1(59,35.3) 59.5,35.3 59.7,35.5 C72D.2@59.7,36.55
  L6 w0.4: C75D.2@58,36.55 C72D.2@59.7,36.55
NetC72E_2: C72E.2 C75E.2 IC17E.6 | length 5
  L1 w0.2: v1(40.2,58.4) 40.625,57.975 IC17E.6@40.625,57.15
  L6 w0.2: C72E.2@39.5,57.15 39.5,58.2 39.7,58.4 v1(40.2,58.4)
  L6 w0.4: C72E.2@39.5,57.15 C75E.2@41.2,57.15
NetC72F_2: C72F.2 C75F.2 IC17F.6 | length 5
  L1 w0.2: IC17F.6@45.375,60.85 45.375,60.025 v1(45.8,59.6)
  L6 w0.2: v1(45.8,59.6) 46.3,59.6 46.5,59.8 C72F.2@46.5,60.85
  L6 w0.4: C75F.2@44.8,60.85 C72F.2@46.5,60.85
NetC72G_2: C72G.2 C75G.2 IC17G.6 | length 5
  L1 w0.2: v1(28.1,87.9) 28.525,87.475 IC17G.6@28.525,86.65
  L6 w0.2: C72G.2@27.4,86.65 27.4,87.7 27.6,87.9 v1(28.1,87.9)
  L6 w0.4: C72G.2@27.4,86.65 C75G.2@29.1,86.65
NetC72H_2: C72H.2 C75H.2 IC17H.6 | length 5
  L1 w0.2: IC17H.6@58.575,80.75 58.575,79.925 v1(59,79.5)
  L6 w0.2: v1(59,79.5) 59.5,79.5 59.7,79.7 C72H.2@59.7,80.75
  L6 w0.4: C75H.2@58,80.75 C72H.2@59.7,80.75
NetC78A_2: C78A.2 C79A.2 IC18A.3 | length 3.2
  L1 w0.3: C78A.2@36.45,6.9 36.45,9.15 36.565,9.265 IC18A.3@36.565,10.05
NetC78B_2: C78B.2 C79B.2 IC18B.3 | length 3.2
  L1 w0.3: IC18B.3@49.435,19.55 49.435,20.335 49.55,20.45 C78B.2@49.55,22.7
NetC78C_2: C78C.2 C79C.2 IC18C.3 | length 3.2
  L1 w0.3: C78C.2@24.35,36.4 24.35,38.65 24.465,38.765 IC18C.3@24.465,39.55
NetC78D_2: C78D.2 C79D.2 IC18D.3 | length 3.2
  L1 w0.3: IC18D.3@62.635,39.45 62.635,40.235 62.75,40.35 C78D.2@62.75,42.6
NetC78E_2: C78E.2 C79E.2 IC18E.3 | length 3.2
  L1 w0.3: C78E.2@36.45,51.1 36.45,53.35 36.565,53.465 IC18E.3@36.565,54.25
NetC78F_2: C78F.2 C79F.2 IC18F.3 | length 3.2
  L1 w0.3: IC18F.3@49.435,63.75 49.435,64.535 49.55,64.65 C78F.2@49.55,66.9
NetC78G_2: C78G.2 C79G.2 IC18G.3 | length 3.2
  L1 w0.3: C78G.2@24.35,80.6 24.35,82.85 24.465,82.965 IC18G.3@24.465,83.75
NetC78H_2: C78H.2 C79H.2 IC18H.3 | length 3.2
  L1 w0.3: IC18H.3@62.635,83.65 62.635,84.435 62.75,84.55 C78H.2@62.75,86.8
NetC80A_2: C80A.2 C81A.1 IC21A.3 | length 4.8
  L1 w0.2: IC21A.3@76.05,32.625 77.175,32.625 v1(77.4,32.4)
  L6 w0.2: C81A.1@75.65,32.9 76.9,32.9 v1(77.4,32.4)
  L6 w0.45: C81A.1@75.65,32.9 75.65,32.1 C80A.2@76.05,31.7
NetC80B_2: C80B.2 C81B.1 IC21B.3 | length 4.8
  L1 w0.2: IC21B.3@76.05,76.825 77.175,76.825 v1(77.4,76.6)
  L6 w0.2: C81B.1@75.65,77.1 76.9,77.1 v1(77.4,76.6)
  L6 w0.45: C81B.1@75.65,77.1 75.65,76.3 C80B.2@76.05,75.9
NetC82A_2: C82A.2 C83A.2 C84A.1 IC21A.14 | length 5.4
  L1 w0.2: v1(68.8,32.4) 69.025,32.625 IC21A.14@70.15,32.625
  L6 w0.2: v1(68.8,32.4) 68.8,31.8 69,31.6 C82A.2@69.75,31.6
  L6 w0.45: C82A.2@69.75,31.6 69.75,32.3 C83A.2@70.25,32.8 C84A.1@70.25,33.7
NetC82B_2: C82B.2 C83B.2 C84B.1 IC21B.14 | length 5.4
  L1 w0.2: v1(68.8,76.6) 69.025,76.825 IC21B.14@70.15,76.825
  L6 w0.2: v1(68.8,76.6) 68.8,76 69,75.8 C82B.2@69.75,75.8
  L6 w0.45: C82B.2@69.75,75.8 69.75,76.5 C83B.2@70.25,77 C84B.1@70.25,77.9
NetC85A_2: C85A.2 C86A.2 IC21A.11 | length 4.5
  L1 w0.2: v1(68.9,35) 69.325,34.575 IC21A.11@70.15,34.575
  L6 w0.2: v1(68.9,35) 69.3,34.6 C86A.2@70.25,34.6
  L6 w0.45: C86A.2@70.25,34.6 70.3,34.65 C85A.2@70.3,36.1
NetC85B_2: C85B.2 C86B.2 IC21B.11 | length 4.5
  L1 w0.2: v1(68.9,79.2) 69.325,78.775 IC21B.11@70.15,78.775
  L6 w0.2: v1(68.9,79.2) 69.3,78.8 C86B.2@70.25,78.8
  L6 w0.45: C86B.2@70.25,78.8 70.3,78.85 C85B.2@70.3,80.3
NetC87A_2: C87A.2 C88A.2 IC21A.6 | length 5.2
  L1 w0.2: IC21A.6@76.05,34.575 76.875,34.575 v1(77.3,35)
  L6 w0.2: C88A.2@76.05,34.1 77,34.1 77.3,34.4 v1(77.3,35)
  L6 w0.45: C87A.2@76,35.9 76.05,35.85 C88A.2@76.05,34.1
NetC87B_2: C87B.2 C88B.2 IC21B.6 | length 5.2
  L1 w0.2: IC21B.6@76.05,78.775 76.875,78.775 v1(77.3,79.2)
  L6 w0.2: C88B.2@76.05,78.3 77,78.3 77.3,78.6 v1(77.3,79.2)
  L6 w0.45: C87B.2@76,80.1 76.05,80.05 C88B.2@76.05,78.3
NetC90A_1: C90A.1 IC51A.6 R36A.2 R66A.1 | length 3.6
  L1 w0.25: IC51A.6@26.065,8.7 26.065,7.805 26.22,7.65 C90A.1@26.22,7.1 ; R36A.2@26.25,5.12 26.25,6.1 C90A.1@26.25,7.1
NetC90A_2: C90A.2 IC51A.7 R67A.1 | length 2.8
  L1 w0.25: C90A.2@27.12,7.1 27.12,7.55 27.335,7.765 IC51A.7@27.335,8.7 ; C90A.2@27.15,7.1 28.17,7.1 R67A.1@28.2,7.07
NetC90B_1: C90B.1 IC51B.6 R36B.2 R66B.1 | length 3.6
  L1 w0.25: IC51B.6@26.065,52.9 26.065,52.005 26.22,51.85 C90B.1@26.22,51.3 ; R36B.2@26.25,49.32 26.25,50.3 C90B.1@26.25,51.3
NetC90B_2: C90B.2 IC51B.7 R67B.1 | length 2.8
  L1 w0.25: C90B.2@27.12,51.3 27.12,51.75 27.335,51.965 IC51B.7@27.335,52.9 ; C90B.2@27.15,51.3 28.17,51.3 R67B.1@28.2,51.27
NetC91A_1: C91A.1 IC51A.2 R70A.2 R71A.1 | length 3.7
  L1 w0.25: IC51A.2@27.335,14.1 27.335,15.035 27.55,15.25 C91A.1@27.55,15.7 27.55,16.68 R71A.1@27.53,16.7 R70A.2@27.53,17.7
NetC91A_2: C91A.2 IC51A.1 R72A.1 | length 2.7
  L1 w0.25: IC51A.1@28.605,14.1 28.605,14.995 28.45,15.15 C91A.2@28.45,15.7 29.47,15.7 R72A.1@29.5,15.73
NetC91B_1: C91B.1 IC51B.2 R70B.2 R71B.1 | length 3.7
  L1 w0.25: IC51B.2@27.335,58.3 27.335,59.235 27.55,59.45 C91B.1@27.55,59.9 27.55,60.88 R71B.1@27.53,60.9 R70B.2@27.53,61.9
NetC91B_2: C91B.2 IC51B.1 R72B.1 | length 2.7
  L1 w0.25: IC51B.1@28.605,58.3 28.605,59.195 28.45,59.35 C91B.2@28.45,59.9 29.47,59.9 R72B.1@29.5,59.93
NetC97A_1: C97A.1 IC22A.3 | length 3.1
  L1 w0.2: IC22A.3@76.05,15.825 77.075,15.825 v1(77.4,15.5)
  L6 w0.2: C97A.1@76.15,14.5 76.55,14.9 76.8,14.9 v1(77.4,15.5)
NetC97B_1: C97B.1 IC22B.3 | length 3.1
  L1 w0.2: IC22B.3@76.05,60.025 77.175,60.025 77.3,59.9 v1(77.3,59.6)
  L6 w0.2: C97B.1@76.15,58.7 76.55,59.1 76.8,59.1 v1(77.3,59.6)
NetC98A_2: C98A.2 IC22A.14 | length 2.3
  L1 w0.2: v1(69.025,15.825) IC22A.14@70.15,15.825
  L6 w0.2: v1(69.025,15.825) 69.029,15.821 69.329,15.821 C98A.2@69.95,15.2
NetC98B_2: C98B.2 IC22B.14 | length 2.3
  L1 w0.2: v1(69.025,60.025) IC22B.14@70.15,60.025
  L6 w0.2: v1(69.025,60.025) 69.029,60.021 69.329,60.021 C98B.2@69.95,59.4
NetC99A_2: C99A.2 C100A.2 IC22A.11 | length 3.6
  L1 w0.2: v1(68.9,18.2) 69.325,17.775 IC22A.11@70.15,17.775
  L6 w0.2: v1(68.9,18.2) 69.3,17.8 C100A.2@69.95,17.8
  L6 w0.4: C99A.2@69.95,16.8 C100A.2@69.95,17.8
NetC99B_2: C99B.2 C100B.2 IC22B.11 | length 3.6
  L1 w0.2: v1(68.9,62.4) 69.325,61.975 IC22B.11@70.15,61.975
  L6 w0.2: v1(68.9,62.4) 69.3,62 C100B.2@69.95,62
  L6 w0.4: C99B.2@69.95,61 C100B.2@69.95,62
NetC101A_2: C101A.2 C102A.1 IC22A.6 | length 4.9
  L1 w0.2: IC22A.6@76.05,17.775 76.875,17.775 v1(77.3,18.2)
  L6 w0.2: C102A.1@76.15,16.6 76.9,16.6 77.3,17 v1(77.3,18.2)
  L6 w0.4: C101A.2@76.15,15.6 C102A.1@76.15,16.6
NetC101B_2: C101B.2 C102B.1 IC22B.6 | length 4.9
  L1 w0.2: IC22B.6@76.05,61.975 76.875,61.975 v1(77.3,62.4)
  L6 w0.2: C102B.1@76.15,60.8 76.9,60.8 77.3,61.2 v1(77.3,62.4)
  L6 w0.4: C101B.2@76.15,59.8 C102B.1@76.15,60.8
NetC105A_2: C105A.2 C106A.1 IC23A.3 | length 5.8
  L1 w0.2: IC23A.3@76.05,21.425 77.175,21.425 v1(77.4,21.2)
  L6 w0.2: C106A.1@76.15,18.6 76.575,18.6 76.9,18.925 76.9,20.7 v1(77.4,21.2)
  L6 w0.4: C105A.2@76.15,17.6 C106A.1@76.15,18.6
NetC105B_2: C105B.2 C106B.1 IC23B.3 | length 5.8
  L1 w0.2: IC23B.3@76.05,65.625 77.175,65.625 v1(77.4,65.4)
  L6 w0.2: C106B.1@76.15,62.8 76.575,62.8 76.9,63.125 76.9,64.9 v1(77.4,65.4)
  L6 w0.4: C105B.2@76.15,61.8 C106B.1@76.15,62.8
NetC107A_2: C107A.2 C108A.2 C109A.2 IC23A.14 | length 4.8
  L1 w0.2: v1(68.8,21.2) 69.025,21.425 IC23A.14@70.15,21.425
  L6 w0.2: v1(68.8,21.2) 69.2,20.8 C108A.2@69.95,20.8
  L6 w0.4: C109A.2@69.95,18.8 C107A.2@69.95,19.8 C108A.2@69.95,20.8
NetC107B_2: C107B.2 C108B.2 C109B.2 IC23B.14 | length 4.8
  L1 w0.2: v1(68.8,65.4) 69.025,65.625 IC23B.14@70.15,65.625
  L6 w0.2: v1(68.8,65.4) 69.2,65 C108B.2@69.95,65
  L6 w0.4: C109B.2@69.95,63 C107B.2@69.95,64 C108B.2@69.95,65
NetC110A_2: C110A.2 C111A.2 C112A.1 IC23A.11 | length 4.5
  L1 w0.2: v1(68.9,23.8) 69.325,23.375 IC23A.11@70.15,23.375
  L6 w0.2: v1(68.9,23.8) C110A.2@69.75,23.8
  L6 w0.4: C110A.2@69.75,23.8 69.75,22.8 C112A.1@69.95,22.6 C111A.2@69.95,21.7
NetC110B_2: C110B.2 C111B.2 C112B.1 IC23B.11 | length 4.5
  L1 w0.2: v1(68.9,68) 69.325,67.575 IC23B.11@70.15,67.575
  L6 w0.2: v1(68.9,68) C110B.2@69.75,68
  L6 w0.4: C110B.2@69.75,68 69.75,67 C112B.1@69.95,66.8 C111B.2@69.95,65.9
NetC113A_2: C113A.2 C114A.2 C117A.1 IC23A.6 | length 6.7
  L1 w0.2: IC23A.6@76.05,23.375 76.875,23.375 v1(77.3,23.8)
  L6 w0.2: C113A.2@76.05,22.3 76.9,22.3 77.3,22.7 v1(77.3,23.8)
  L6 w0.4: C113A.2@76.05,22.3 C114A.2@76.05,20.8 76.15,20.7 C117A.1@76.15,19.6
NetC113B_2: C113B.2 C114B.2 C117B.1 IC23B.6 | length 6.7
  L1 w0.2: IC23B.6@76.05,67.575 76.875,67.575 v1(77.3,68)
  L6 w0.2: C113B.2@76.05,66.5 76.9,66.5 77.3,66.9 v1(77.3,68)
  L6 w0.4: C113B.2@76.05,66.5 C114B.2@76.05,65 76.15,64.9 C117B.1@76.15,63.8
NetC118A_2: C118A.2 C119A.2 C120A.1 IC24A.3 | length 7.1
  L1 w0.2: IC24A.3@76.05,27.025 77.175,27.025 v1(77.4,26.8)
  L6 w0.2: C120A.1@75.45,27.1 76.4,27.1 76.7,26.8 v1(77.4,26.8)
  L6 w0.4: C120A.1@75.45,27.1 75.45,26.325 76,25.775 C118A.2@76,25.6 76.05,25.55 C119A.2@76.05,23.8
NetC118B_2: C118B.2 C119B.2 C120B.1 IC24B.3 | length 7.1
  L1 w0.2: IC24B.3@76.05,71.225 77.175,71.225 v1(77.4,71)
  L6 w0.2: C120B.1@75.45,71.3 76.4,71.3 76.7,71 v1(77.4,71)
  L6 w0.4: C120B.1@75.45,71.3 75.45,70.525 76,69.975 C118B.2@76,69.8 76.05,69.75 C119B.2@76.05,68
NetC132_2: C132.2 IC30.16 | length 2
  L1 w0.5: IC30.16@148.549,88.481 148.564,88.496 148.564,89.376 C132.2@149.344,90.156
NetC137_1: C137.1 R104.1 R105.2 SW1.2 T7.3 | length 1.5
  L1 w0.6: v1(138.099,88.891) T7.3@139.594,88.891
  other v1: 142.594,80.756 142.594,81.456 142.594,82.156 142.594,82.856 142.594,83.556 138.646,88.891
NetC137_2: C137.2 C140.2 Tr1.2 | length 0.4
  L6 w1.5: C137.2@137.244,82.056 C137.2@137.244,82.156 C137.2@137.244,82.483
  other v1: 152.444,72.156 152.444,72.856 152.444,73.556 152.444,74.256
NetC138_1: C138.1 R110.2 | length 1.5
  L1 w0.2: R110.2@149.894,77.656 C138.1@151.394,77.656
NetC139_1: C139.1 R109.1 | length 4.4
  L1 w0.3: R109.1@158.994,76.256 159.218,76.031 159.218,75.531 159.594,75.156 159.594,73.756 160.044,73.305 160.944,73.305 C139.1@160.994,73.256
NetC139_2: C139.2 C140.1 | length 1.9
  L1 w0.3: C140.1@156.294,73.256 C139.2@158.194,73.256
NetC145_1: C145.1 C146.1 IC32.2 R118.2 R126.1 | length 7.2
  L6 w0.2: R126.1@120.6,54.8 C146.1@122.2,54.8 122.2,53.53 R118.2@122.17,53.5 C145.1@123.25,53.5 123.25,52.95 123.5,52.7 124.9,52.7 125.15,52.95 125.15,53.25 IC32.2@125.35,53.45
NetC145_2: C145.2 R117.1 | length 1.4
  L6 w0.2: R117.1@123.8,54.8 123.8,53.85 C145.2@124.15,53.5
NetC154A_2: C154A.2 C155A.2 C156A.2 IC24A.14 | length 5.9
  L1 w0.2: v1(68.8,26.8) 69.025,27.025 IC24A.14@70.15,27.025
  L6 w0.2: v1(68.8,26.8) 69.05,27.05 C154A.2@69.75,27.05
  L6 w0.4: C155A.2@69.75,25.3 C154A.2@69.75,27.05 ; C154A.2@69.8,27.1 69.8,28.15 C156A.2@70.25,28.6
NetC154B_2: C154B.2 C155B.2 C156B.2 IC24B.14 | length 5.9
  L1 w0.2: v1(68.8,71) 69.025,71.225 IC24B.14@70.15,71.225
  L6 w0.2: v1(68.8,71) 69.05,71.25 C154B.2@69.75,71.25
  L6 w0.4: C155B.2@69.75,69.5 C154B.2@69.75,71.25 ; C154B.2@69.8,71.3 69.8,72.35 C156B.2@70.25,72.8
NetC157A_2: C157A.2 IC24A.11 | length 2.8
  L1 w0.2: v1(68.9,29.4) 69.325,28.975 IC24A.11@70.15,28.975
  L6 w0.2: v1(68.9,29.4) 69.45,29.4 69.525,29.475 69.6,29.475 70,29.875 C157A.2@70,29.95
NetC157B_2: C157B.2 IC24B.11 | length 2.8
  L1 w0.2: v1(68.9,73.6) 69.325,73.175 IC24B.11@70.15,73.175
  L6 w0.2: v1(68.9,73.6) 69.45,73.6 69.525,73.675 69.6,73.675 70,74.075 C157B.2@70,74.15
NetC166_2: C166.2 IC36.9 | length 1.5
  L1 w0.2: C166.2@177.494,76.206 177.994,76.706 IC36.9@177.994,77.506
NetC172_1: C172.1 FL1.3 J2.1 J2.2 | length 4.6
  L6 w0.5: J2.2@202.639,63.145 J2.1@202.639,67.777
  other v1: 189.294,77.856 190.094,77.856 190.894,77.856 189.694,78.556 190.494,78.556
NetC172_2: C172.2 FL1.1 J2.3 J2.4 | length 4.4
  L6 w0.5: J2.4@197.139,63.145 J2.3@197.139,67.345 J2.3@197.264,67.47
  other v1: 184.994,77.856 185.794,77.856 186.594,77.856 185.394,78.556 186.194,78.556
NetC175A_2: C175A.2 C176A.2 IC24A.6 | length 5
  L1 w0.2: IC24A.6@76.05,28.975 76.875,28.975 v1(77.3,29.4)
  L6 w0.2: C176A.2@76.05,30.1 77.1,30.1 77.3,29.9 v1(77.3,29.4)
  L6 w0.4: C175A.2@76.05,28.4 C176A.2@76.05,30.1
NetC175B_2: C175B.2 C176B.2 IC24B.6 | length 5
  L1 w0.2: IC24B.6@76.05,73.175 76.875,73.175 v1(77.3,73.6)
  L6 w0.2: C176B.2@76.05,74.3 77.1,74.3 77.3,74.1 v1(77.3,73.6)
  L6 w0.4: C175B.2@76.05,72.6 C176B.2@76.05,74.3
NetC179_2: C179.2 IC42.6 IC42.7 R183.2 T19.3 | length 23.9
  L1 w0.125: IC42.6@171.459,-0.244 171.459,0.821 171.594,0.956 172.594,0.956 172.729,0.821 ; IC42.7@172.729,-0.244 172.729,0.821 ; v1(181.594,1.156) 173.064,1.156 172.729,0.821 ; v1(184.294,3.256) 184.744,3.706 T19.3@184.744,4.356 185.694,4.356 186.094,4.756 C179.2@186.094,6.956 186.094,7.656 185.994,7.756 184.994,7.756 184.731,8.018 184.731,8.068 184.344,8.456 R183.2@184.294,8.456
  L6 w0.125: v1(181.594,1.156) 182.994,2.556 183.594,2.556 v1(184.294,3.256)
NetC181_2: C181.2 IC42.5 | length 1.7
  L1 w0.3: IC42.5@170.189,-0.244 170.244,-0.299 C181.2@170.244,-1.944
NetC182_2: C182.2 D26.1 R185.2 | length 3.3
  L1 w0.125: R185.2@174.094,11.756 C182.2@174.094,10.156 174.094,9.456 174.244,9.306 D26.1@174.244,8.556
NetC183A_2: C183A.2 IC25A.3 | length 1.8
  L1 w0.45: C183A.2@71.7,38 71.7,38.175 72.16,38.635 IC25A.3@73.15,38.635
NetC183B_2: C183B.2 IC25B.3 | length 1.8
  L1 w0.45: C183B.2@71.7,82.2 71.7,82.375 72.16,82.835 IC25B.3@73.15,82.835
NetC216A_2: C216A.2 R212A.1 | length 1.5
  L1 w0.132: C216A.2@1.45,44.7 R212A.1@2.9,44.7
NetC216B_2: C216B.2 R212B.1 | length 1.5
  L1 w0.132: C216B.2@1.45,83.7 R212B.1@2.9,83.7
NetC222A_1: C222A.1 R216A.1 | length 1.5
  L1 w0.132: C222A.1@5.3,24.35 5.7,23.95 R216A.1@5.7,23
NetC222B_1: C222B.1 R216B.1 | length 1.5
  L1 w0.132: C222B.1@5.3,63.35 5.7,62.95 R216B.1@5.7,62
NetC223A_1: C223A.1 C225A.2 IC60A.1 | length 8.3
  L1 w0.132: C223A.1@8.85,14.4 9.55,13.7 14.1,13.7 14.45,14.05 C225A.2@14.45,14.6 14.45,15.35 14.473,15.374 IC60A.1@14.473,16.3
NetC223A_2: C223A.2 R217A.2 | length 1.4
  L1 w0.132: R217A.2@7.9,15.8 7.95,15.75 C223A.2@7.95,14.4
NetC223B_1: C223B.1 C225B.2 IC60B.1 | length 8.3
  L1 w0.132: C223B.1@8.85,53.4 9.55,52.7 14.1,52.7 14.45,53.05 C225B.2@14.45,53.6 14.45,54.35 14.473,54.374 IC60B.1@14.473,55.3
NetC223B_2: C223B.2 R217B.2 | length 1.4
  L1 w0.132: R217B.2@7.9,54.8 7.95,54.75 C223B.2@7.95,53.4
NetC224A_1: C224A.1 C226A.2 IC60A.3 L7A.1 | length 4.9
  L1 w0.132: C224A.1@12.85,22.7 13.5,22.7 13.7,22.5 14.4,22.5 14.45,22.45 14.45,21 14.45,20.25 14.473,20.227 IC60A.3@14.473,19.3
NetC224A_2: C224A.2 R218A.1 | length 1.3
  L1 w0.132: R218A.1@10.6,22.7 C224A.2@11.95,22.7
NetC224B_1: C224B.1 C226B.2 IC60B.3 L7B.1 | length 4.9
  L1 w0.132: C224B.1@12.85,61.7 13.5,61.7 13.7,61.5 L7B.1@14.4,61.5 14.45,61.45 C226B.2@14.45,60 14.45,59.25 14.473,59.227 IC60B.3@14.473,58.3
NetC224B_2: C224B.2 R218B.1 | length 1.3
  L1 w0.132: R218B.1@10.6,61.7 C224B.2@11.95,61.7
NetC225A_1: C225A.1 R222A.2 | length 1
  L1 w0.132: R222A.2@12.57,14.6 C225A.1@13.55,14.6
NetC225B_1: C225B.1 R222B.2 | length 1
  L1 w0.132: R222B.2@12.57,53.6 C225B.1@13.55,53.6
NetC226A_1: C226A.1 R223A.2 | length 1
  L1 w0.132: R223A.2@12.57,21 C226A.1@13.55,21
NetC226B_1: C226B.1 R223B.2 | length 1
  L1 w0.132: R223B.2@12.57,60 C226B.1@13.55,60
NetD1_2: D1.2 R100.2 T7.2 | length 5.4
  L1 w0.5: T7.2@139.594,87.621 141.329,87.621 141.994,86.956 D1.2@142.694,86.956 142.694,86.456 143.088,86.061 143.088,85.261 R100.2@143.194,85.156
NetD2_2: D2.2 D5.1 Tr1.3 | length 10
  L1 w1.2: D2.2@90.5,67.15 90.675,66.975 90.675,66.125 93.578,63.222 94.227,63.222 Tr1.3@94.285,63.165
  L6 w1.2: Tr1.3@94.285,63.165 95.785,63.165 97,61.95 97.325,61.95 97.5,61.775 D5.1@97.5,61.45
NetD3_2: D3.2 D6.1 Tr1.4 | length 8.5
  L1 w1.2: D3.2@93.5,60.05 95.104,60.05 Tr1.4@97.275,57.879
  L6 w1.2: Tr1.4@97.275,57.879 98.679,57.879 99.15,58.35 D6.1@100.9,58.35
NetD4_2: D4.2 R103.2 T7.4 | length 5.9
  L1 w0.5: T7.4@139.594,90.161 141.399,90.161 141.994,90.756 R103.2@143.194,90.756 143.194,89.956 142.694,89.456 D4.2@142.694,88.956
NetD7_2: D7.2 D8.1 R109.2 | length 3.6
  L1 w0.3: D8.1@157.394,75.756 D7.2@157.394,77.756 157.994,77.756 158.094,77.856 R109.2@158.994,77.856
NetD9A_2: D9A.2 IC19A.3 | length 1.9
  L1 w0.25: D9A.2@32.85,8.55 32.85,8.75 33.025,8.925 33.225,8.925 33.565,9.265 IC19A.3@33.565,10.05
NetD9A_3: D9A.3 R208A.1 | length 5.4
  L1 w0.25: R208A.1@32.3,9.93 32.28,9.93 32.115,9.765 32.115,9.745 32,9.63 32,6.6 32.35,6.25 D9A.3@33.8,6.25
NetD9B_2: D9B.2 IC19B.3 | length 1.9
  L1 w0.25: IC19B.3@52.435,19.55 52.435,20.335 52.775,20.675 52.975,20.675 53.15,20.85 D9B.2@53.15,21.05
NetD9B_3: D9B.3 R208B.1 | length 5.4
  L1 w0.25: D9B.3@52.2,23.35 53.65,23.35 54,23 54,19.97 53.885,19.855 53.885,19.835 53.72,19.67 R208B.1@53.7,19.67
NetD9C_2: D9C.2 IC19C.3 | length 1.9
  L1 w0.25: D9C.2@20.75,38.05 20.75,38.25 20.925,38.425 21.125,38.425 21.465,38.765 IC19C.3@21.465,39.55
NetD9C_3: D9C.3 R208C.1 | length 5.4
  L1 w0.25: R208C.1@20.2,39.43 20.18,39.43 20.015,39.265 20.015,39.245 19.9,39.13 19.9,36.1 20.25,35.75 D9C.3@21.7,35.75
NetD9D_2: D9D.2 IC19D.3 | length 1.9
  L1 w0.25: IC19D.3@65.635,39.45 65.635,40.235 65.975,40.575 66.175,40.575 66.35,40.75 D9D.2@66.35,40.95
NetD9D_3: D9D.3 R208D.1 | length 5.4
  L1 w0.25: D9D.3@65.4,43.25 66.85,43.25 67.2,42.9 67.2,39.87 67.085,39.755 67.085,39.735 66.92,39.57 R208D.1@66.9,39.57
NetD9E_2: D9E.2 IC19E.3 | length 1.9
  L1 w0.25: D9E.2@32.85,52.75 32.85,52.95 33.025,53.125 33.225,53.125 33.565,53.465 IC19E.3@33.565,54.25
NetD9E_3: D9E.3 R208E.1 | length 5.4
  L1 w0.25: R208E.1@32.3,54.13 32.28,54.13 32.115,53.965 32.115,53.945 32,53.83 32,50.8 32.35,50.45 D9E.3@33.8,50.45
NetD9F_2: D9F.2 IC19F.3 | length 1.9
  L1 w0.25: IC19F.3@52.435,63.75 52.435,64.535 52.775,64.875 52.975,64.875 53.15,65.05 D9F.2@53.15,65.25
NetD9F_3: D9F.3 R208F.1 | length 5.4
  L1 w0.25: D9F.3@52.2,67.55 53.65,67.55 54,67.2 54,64.17 53.885,64.055 53.885,64.035 53.72,63.87 R208F.1@53.7,63.87
NetD9G_2: D9G.2 IC19G.3 | length 1.9
  L1 w0.25: D9G.2@20.75,82.25 20.75,82.45 20.925,82.625 21.125,82.625 21.465,82.965 IC19G.3@21.465,83.75
NetD9G_3: D9G.3 R208G.1 | length 5.4
  L1 w0.25: R208G.1@20.2,83.63 20.18,83.63 20.015,83.465 20.015,83.445 19.9,83.33 19.9,80.3 20.25,79.95 D9G.3@21.7,79.95
NetD9H_2: D9H.2 IC19H.3 | length 1.9
  L1 w0.25: IC19H.3@65.635,83.65 65.635,84.435 65.975,84.775 66.175,84.775 66.35,84.95 D9H.2@66.35,85.15
NetD9H_3: D9H.3 R208H.1 | length 5.4
  L1 w0.25: D9H.3@65.4,87.45 66.85,87.45 67.2,87.1 67.2,84.07 67.085,83.955 67.085,83.935 66.92,83.77 R208H.1@66.9,83.77
NetD10A_2: D10A.2 IC56A.3 | length 1.5
  L6 w0.45: D10A.2@34.75,8.55 34.75,9.35 34.835,9.435 IC56A.3@34.835,10.05
NetD10A_3: D10A.3 R62A.1 | length 5.4
  L6 w0.25: R62A.1@32.3,9.93 32.28,9.93 32.115,9.765 32.115,9.745 32,9.63 32,6.6 32.35,6.25 D10A.3@33.8,6.25
NetD10B_2: D10B.2 IC56B.3 | length 1.5
  L6 w0.45: IC56B.3@51.165,19.55 51.165,20.165 51.25,20.25 D10B.2@51.25,21.05
NetD10B_3: D10B.3 R62B.1 | length 5.4
  L6 w0.25: D10B.3@52.2,23.35 53.65,23.35 54,23 54,19.97 53.885,19.855 53.885,19.835 53.72,19.67 R62B.1@53.7,19.67
NetD10C_2: D10C.2 IC56C.3 | length 1.5
  L6 w0.45: D10C.2@22.65,38.05 22.65,38.85 22.735,38.935 IC56C.3@22.735,39.55
NetD10C_3: D10C.3 R62C.1 | length 5.4
  L6 w0.25: R62C.1@20.2,39.43 20.18,39.43 20.015,39.265 20.015,39.245 19.9,39.13 19.9,36.1 20.25,35.75 D10C.3@21.7,35.75
NetD10D_2: D10D.2 IC56D.3 | length 1.5
  L6 w0.45: IC56D.3@64.365,39.45 64.365,40.065 64.45,40.15 D10D.2@64.45,40.95
NetD10D_3: D10D.3 R62D.1 | length 5.4
  L6 w0.25: D10D.3@65.4,43.25 66.85,43.25 67.2,42.9 67.2,39.87 67.085,39.755 67.085,39.735 66.92,39.57 R62D.1@66.9,39.57
NetD10E_2: D10E.2 IC56E.3 | length 1.5
  L6 w0.45: D10E.2@34.75,52.75 34.75,53.55 34.835,53.635 IC56E.3@34.835,54.25
NetD10E_3: D10E.3 R62E.1 | length 5.4
  L6 w0.25: R62E.1@32.3,54.13 32.28,54.13 32.115,53.965 32.115,53.945 32,53.83 32,50.8 32.35,50.45 D10E.3@33.8,50.45
NetD10F_2: D10F.2 IC56F.3 | length 1.5
  L6 w0.45: IC56F.3@51.165,63.75 51.165,64.365 51.25,64.45 D10F.2@51.25,65.25
NetD10F_3: D10F.3 R62F.1 | length 5.4
  L6 w0.25: D10F.3@52.2,67.55 53.65,67.55 54,67.2 54,64.17 53.885,64.055 53.885,64.035 53.72,63.87 R62F.1@53.7,63.87
NetD10G_2: D10G.2 IC56G.3 | length 1.5
  L6 w0.45: D10G.2@22.65,82.25 22.65,83.05 22.735,83.135 IC56G.3@22.735,83.75
NetD10G_3: D10G.3 R62G.1 | length 5.4
  L6 w0.25: R62G.1@20.2,83.63 20.18,83.63 20.015,83.465 20.015,83.445 19.9,83.33 19.9,80.3 20.25,79.95 D10G.3@21.7,79.95
NetD10H_2: D10H.2 IC56H.3 | length 1.5
  L6 w0.45: IC56H.3@64.365,83.65 64.365,84.265 64.45,84.35 D10H.2@64.45,85.15
NetD10H_3: D10H.3 R62H.1 | length 5.4
  L6 w0.25: D10H.3@65.4,87.45 66.85,87.45 67.2,87.1 67.2,84.07 67.085,83.955 67.085,83.935 66.92,83.77 R62H.1@66.9,83.77
NetD11A_2: D11A.2 IC35A.3 | length 1.9
  L1 w0.25: D11A.2@71.65,42.35 71.85,42.35 72.025,42.175 72.025,41.975 72.365,41.635 IC35A.3@73.15,41.635
NetD11A_3: D11A.3 R65A.1 | length 5.4
  L1 w0.25: D11A.3@69.35,41.4 69.35,42.85 69.7,43.2 72.73,43.2 72.845,43.085 72.865,43.085 73.03,42.92 R65A.1@73.03,42.9
NetD11B_2: D11B.2 IC35B.3 | length 1.9
  L1 w0.25: D11B.2@71.65,86.55 71.85,86.55 72.025,86.375 72.025,86.175 72.365,85.835 IC35B.3@73.15,85.835
NetD11B_3: D11B.3 R65B.1 | length 5.4
  L1 w0.25: D11B.3@69.35,85.6 69.35,87.05 69.7,87.4 72.73,87.4 72.845,87.285 72.865,87.285 73.03,87.12 R65B.1@73.03,87.1
NetD12A_2: D12A.2 IC57A.3 | length 1.5
  L6 w0.45: D12A.2@71.65,40.45 72.45,40.45 72.535,40.365 IC57A.3@73.15,40.365
NetD12A_3: D12A.3 R210A.1 | length 5.4
  L6 w0.25: D12A.3@69.35,41.4 69.35,42.85 69.7,43.2 72.73,43.2 72.845,43.085 72.865,43.085 73.03,42.92 R210A.1@73.03,42.9
NetD12B_2: D12B.2 IC57B.3 | length 1.5
  L6 w0.45: D12B.2@71.65,84.65 72.45,84.65 72.535,84.565 IC57B.3@73.15,84.565
NetD12B_3: D12B.3 R210B.1 | length 5.4
  L6 w0.25: D12B.3@69.35,85.6 69.35,87.05 69.7,87.4 72.73,87.4 72.845,87.285 72.865,87.285 73.03,87.12 R210B.1@73.03,87.1
NetD13_1: D13.1 D15.2 Tr1.7 | length 10
  L1 w1.2: D13.1@90.3,76.15 91.75,76.15 93,77.4 93,78.752 Tr1.7@94.525,80.277
  L6 w1.2: Tr1.7@94.525,80.277 94.525,81.847 95.228,82.55 95.325,82.55 95.5,82.725 D15.2@95.5,83.05
NetD14_1: D14.1 D16.2 Tr1.8 | length 14.1
  L1 w1.2: Tr1.8@92.902,74.425 96.2,77.723 96.2,82.075 94.85,83.425 94.525,83.425 D14.1@94.35,83.6
  L6 w1.2: Tr1.8@92.902,74.425 92.96,74.368 93.172,74.368 93.189,74.35 D16.2@95.5,74.35
NetD17A_2: D17A.2 R35A.2 R224A.1 | length 56.6
  L1 w0.25: R224A.1@5.7,10.3 D17A.2@5.7,8.75 8.65,8.75 13.5,3.9 55.6,3.9 56,4.3 R35A.2@58.6,4.3
NetD17B_2: D17B.2 R35B.2 R224B.1 | length 56.6
  L1 w0.25: R224B.1@5.7,49.3 D17B.2@5.7,47.75 9.65,47.75 11.9,45.5 20,45.5 22.6,48.1 55.6,48.1 56,48.5 R35B.2@58.6,48.5
NetD18A_2: D18A.2 IC59A.1 R212A.2 R225A.1 | length 8.8
  L1 w0.132: R212A.2@4.9,44.7 6.45,44.7 D18A.2@6.5,44.75 7.95,44.75 9.1,43.6 R225A.1@10.63,43.6 10.63,42.97 11,42.6 IC59A.1@11,41.17
NetD18B_2: D18B.2 IC59B.1 R212B.2 R225B.1 | length 8.8
  L1 w0.132: R212B.2@4.9,83.7 6.45,83.7 D18B.2@6.5,83.75 7.95,83.75 9.1,82.6 R225B.1@10.63,82.6 10.63,81.97 11,81.6 IC59B.1@11,80.17
NetD19A_2: D19A.2 R216A.2 R217A.1 R220A.2 | length 5.3
  L1 w0.132: R216A.2@5.7,21 5.8,20.9 D19A.2@5.8,19.3 R220A.2@5.8,17.8 R217A.1@7.9,17.8
NetD19B_2: D19B.2 R216B.2 R217B.1 R220B.2 | length 5.3
  L1 w0.132: R216B.2@5.7,60 5.8,59.9 D19B.2@5.8,58.3 R220B.2@5.8,56.8 R217B.1@7.9,56.8
NetD23_4: D23.4 J6.H2 R133.2 | length 16.9
  L1 w0.125: R133.2@192.064,4.556 192.064,3.886 192.394,3.556 192.394,2.456 v1(192.944,1.906) D23.4@193.794,1.906
  L3 w0.125: v1(192.944,1.906) 194.994,-0.144 200.094,-0.144 200.294,0.056 203.688,0.056 J6.H2@204.677,1.044
NetD23_6: D23.6 J6.K2 R138.2 | length 11.3
  L1 w0.125: v1(192.944,3.206) D23.6@193.694,3.206 193.694,3.556 194.064,3.926 R138.2@194.064,4.556
  L3 w0.125: v1(192.944,3.206) 195.894,0.256 199.688,0.256 J6.K2@200.477,1.044
NetD25_2: D25.2 D26.2 IC42.2 | length 3.5
  L1 w0.125: D26.2@172.544,8.556 D25.2@172.544,7.056 172.544,6.306 172.729,6.121 IC42.2@172.729,5.156